# Altium PCB modulation_tx.PcbDoc
Units mil, origin at the board's own origin, x right, y up, seen from the top; angles counter-clockwise.
Board outline 1585 x 1705 mil, 2 copper layers (Top Layer, Bottom Layer); 7 components, 8 nets, 22 pads, 0 vias.
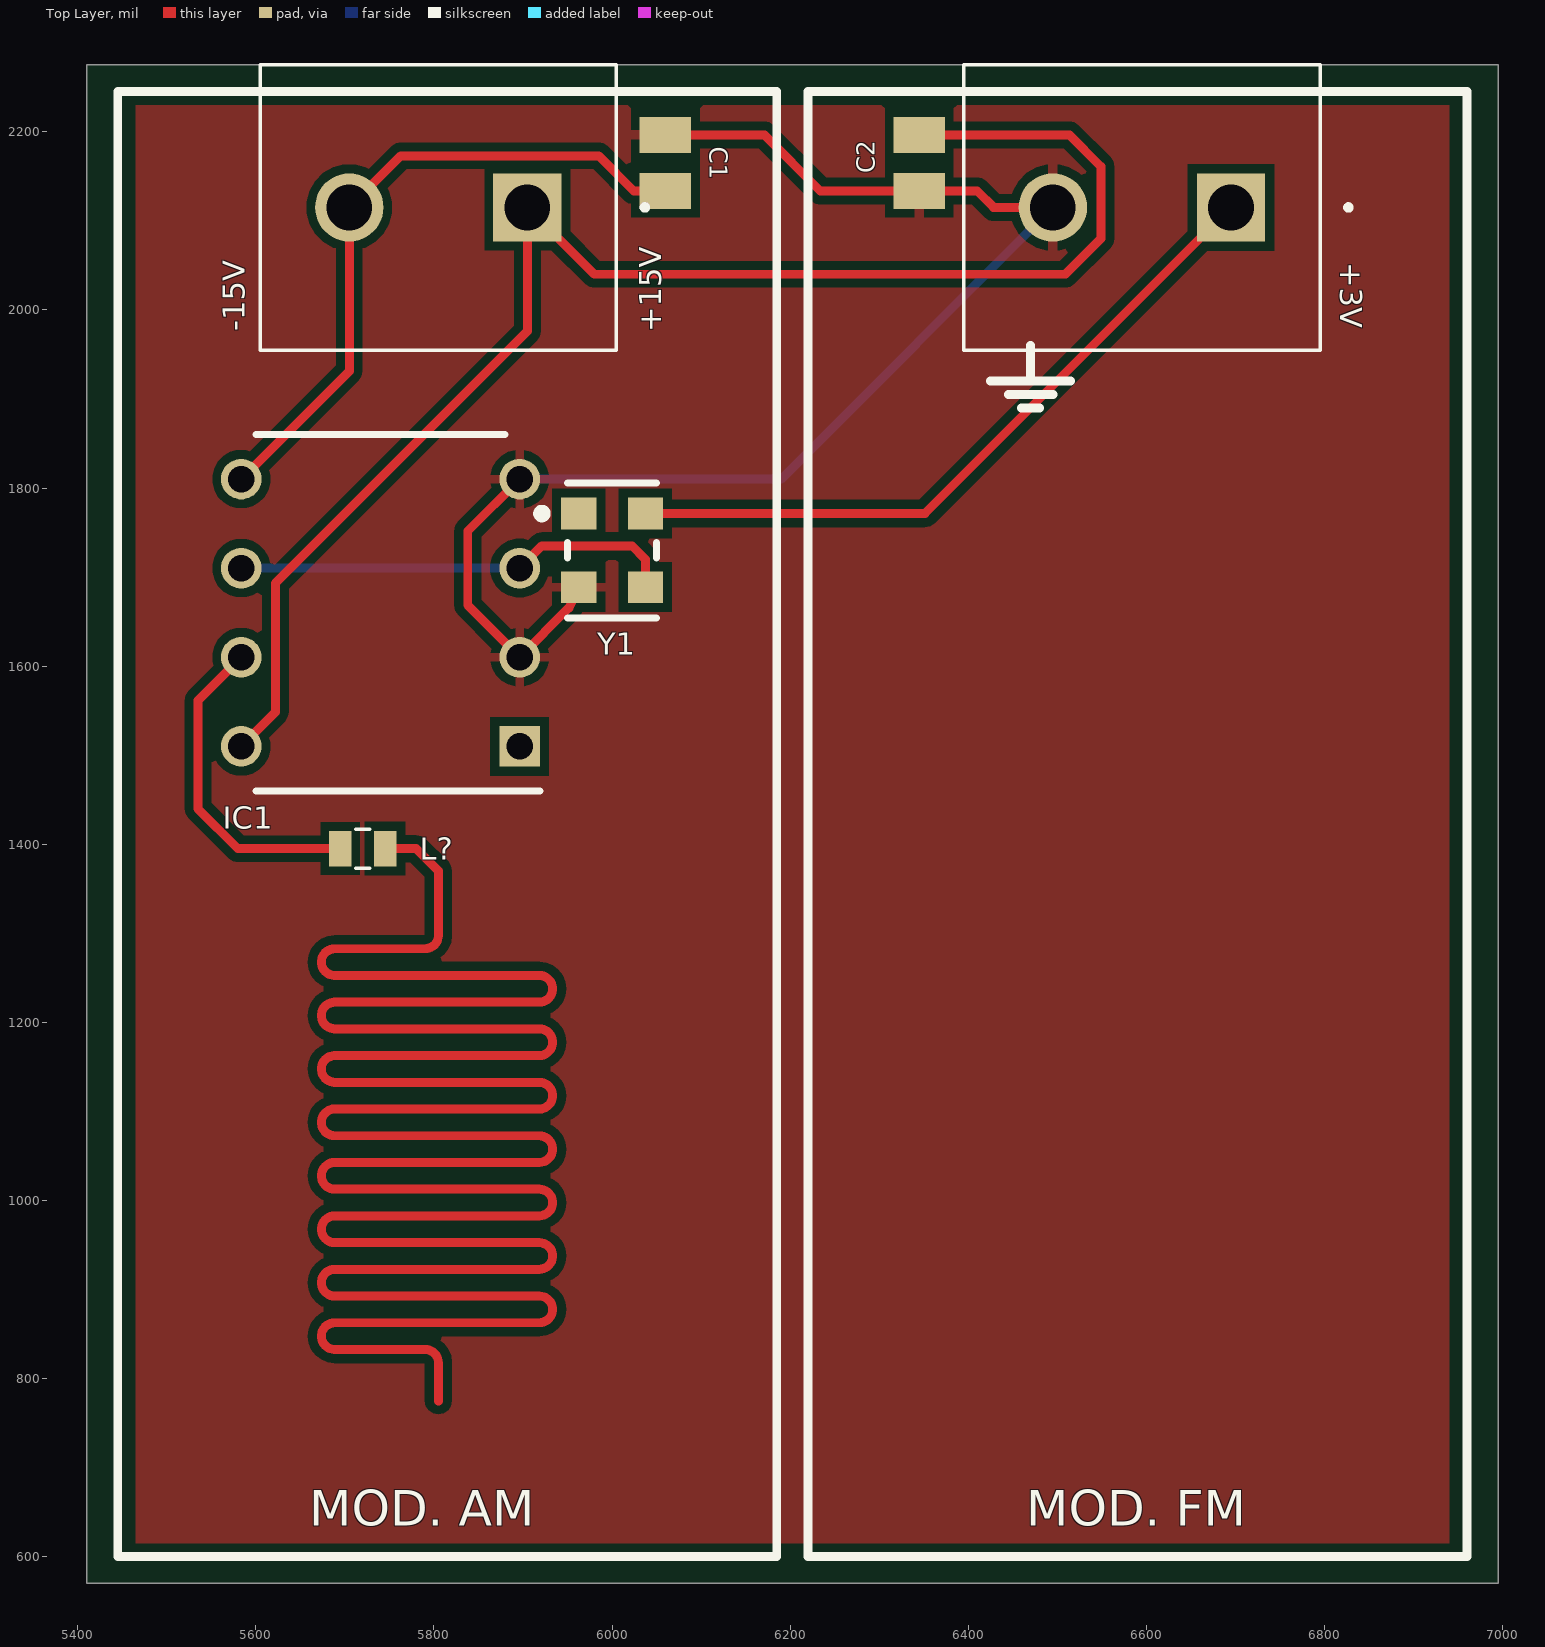
[diagram p0: Top Layer view]
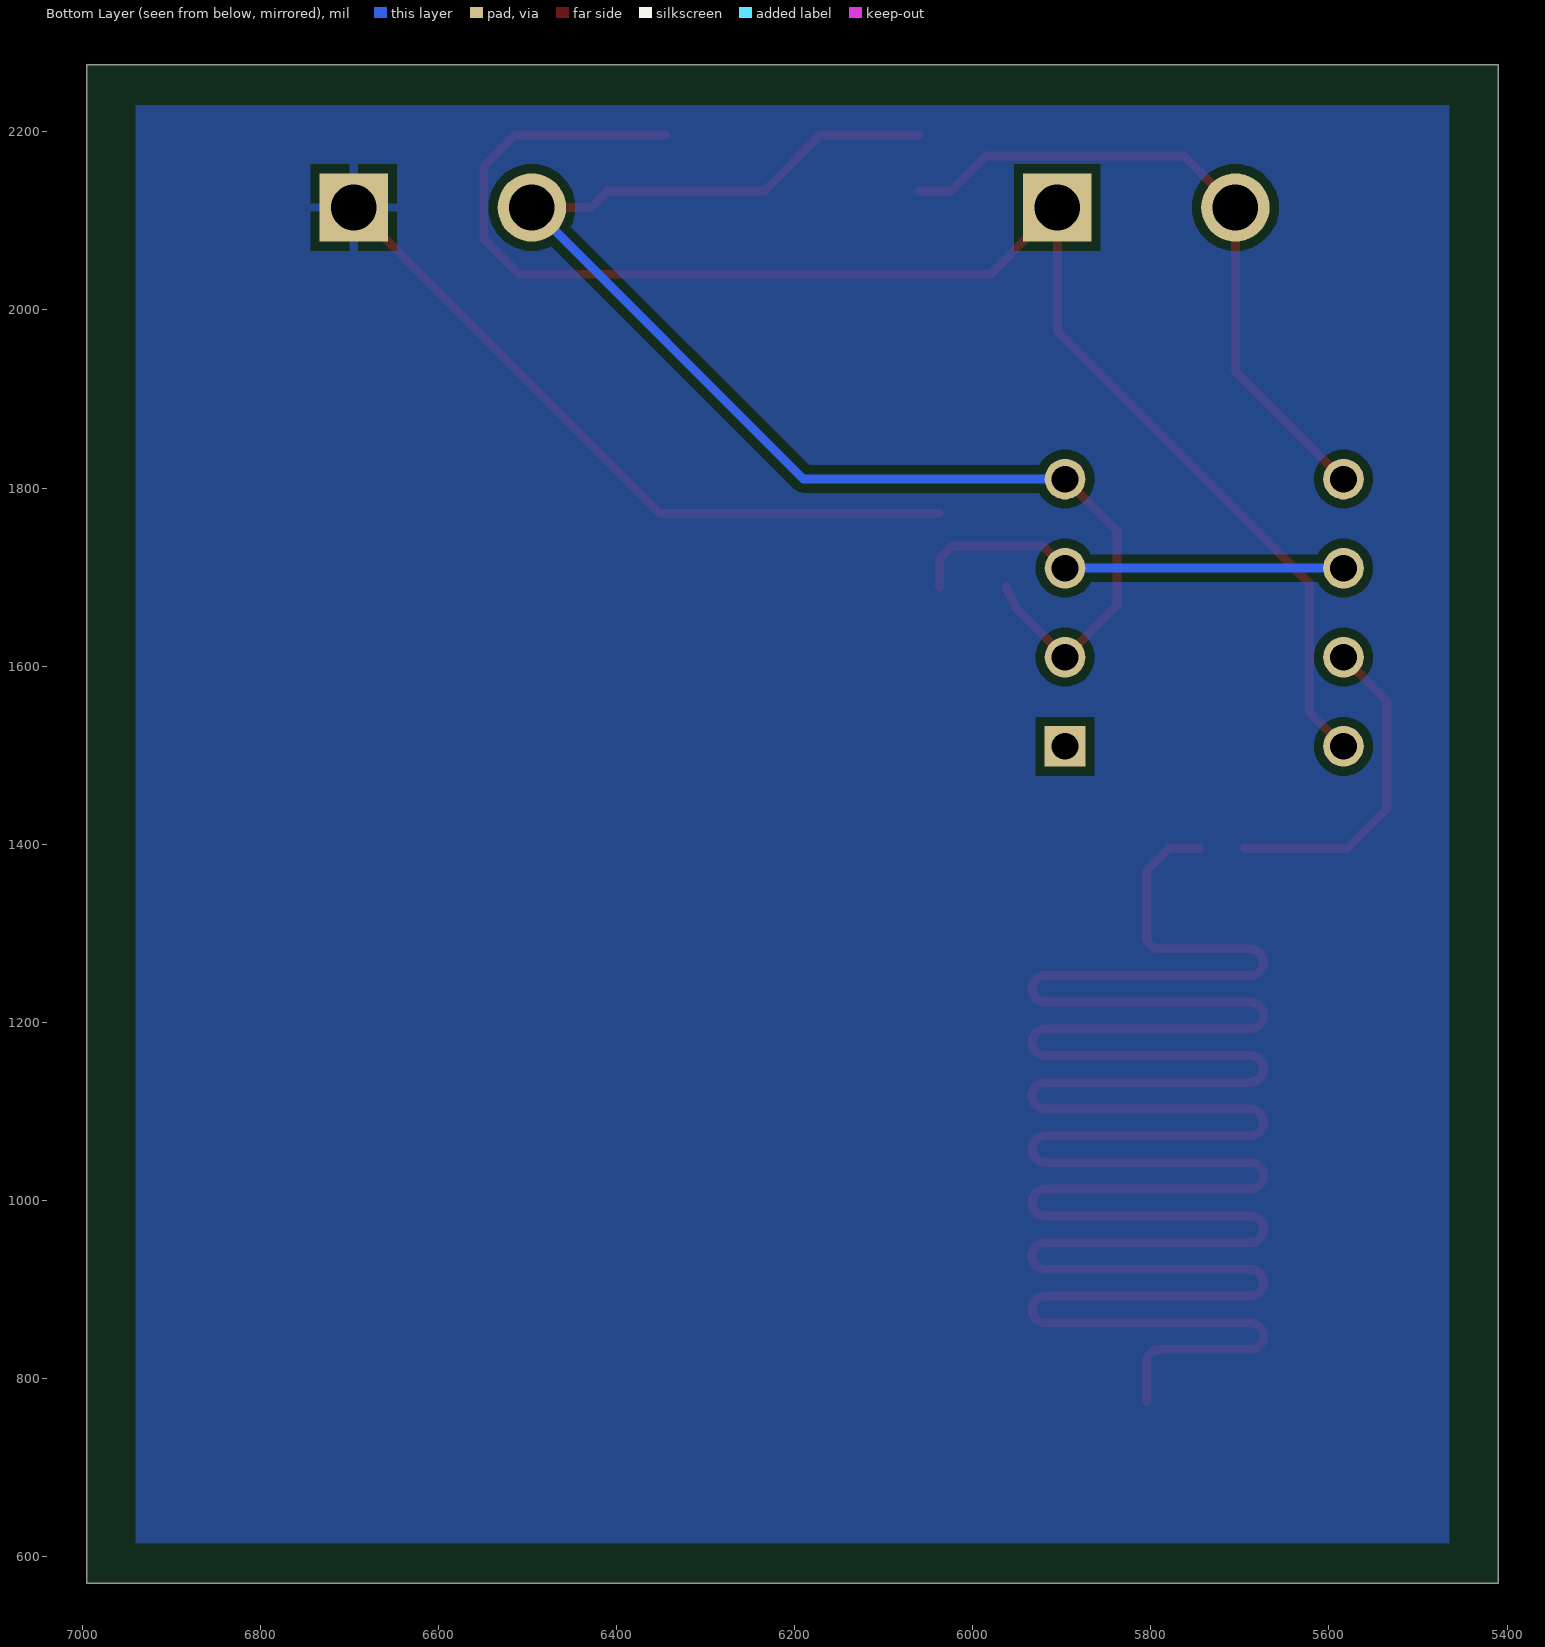
[diagram p1: Bottom Layer view, seen from below]
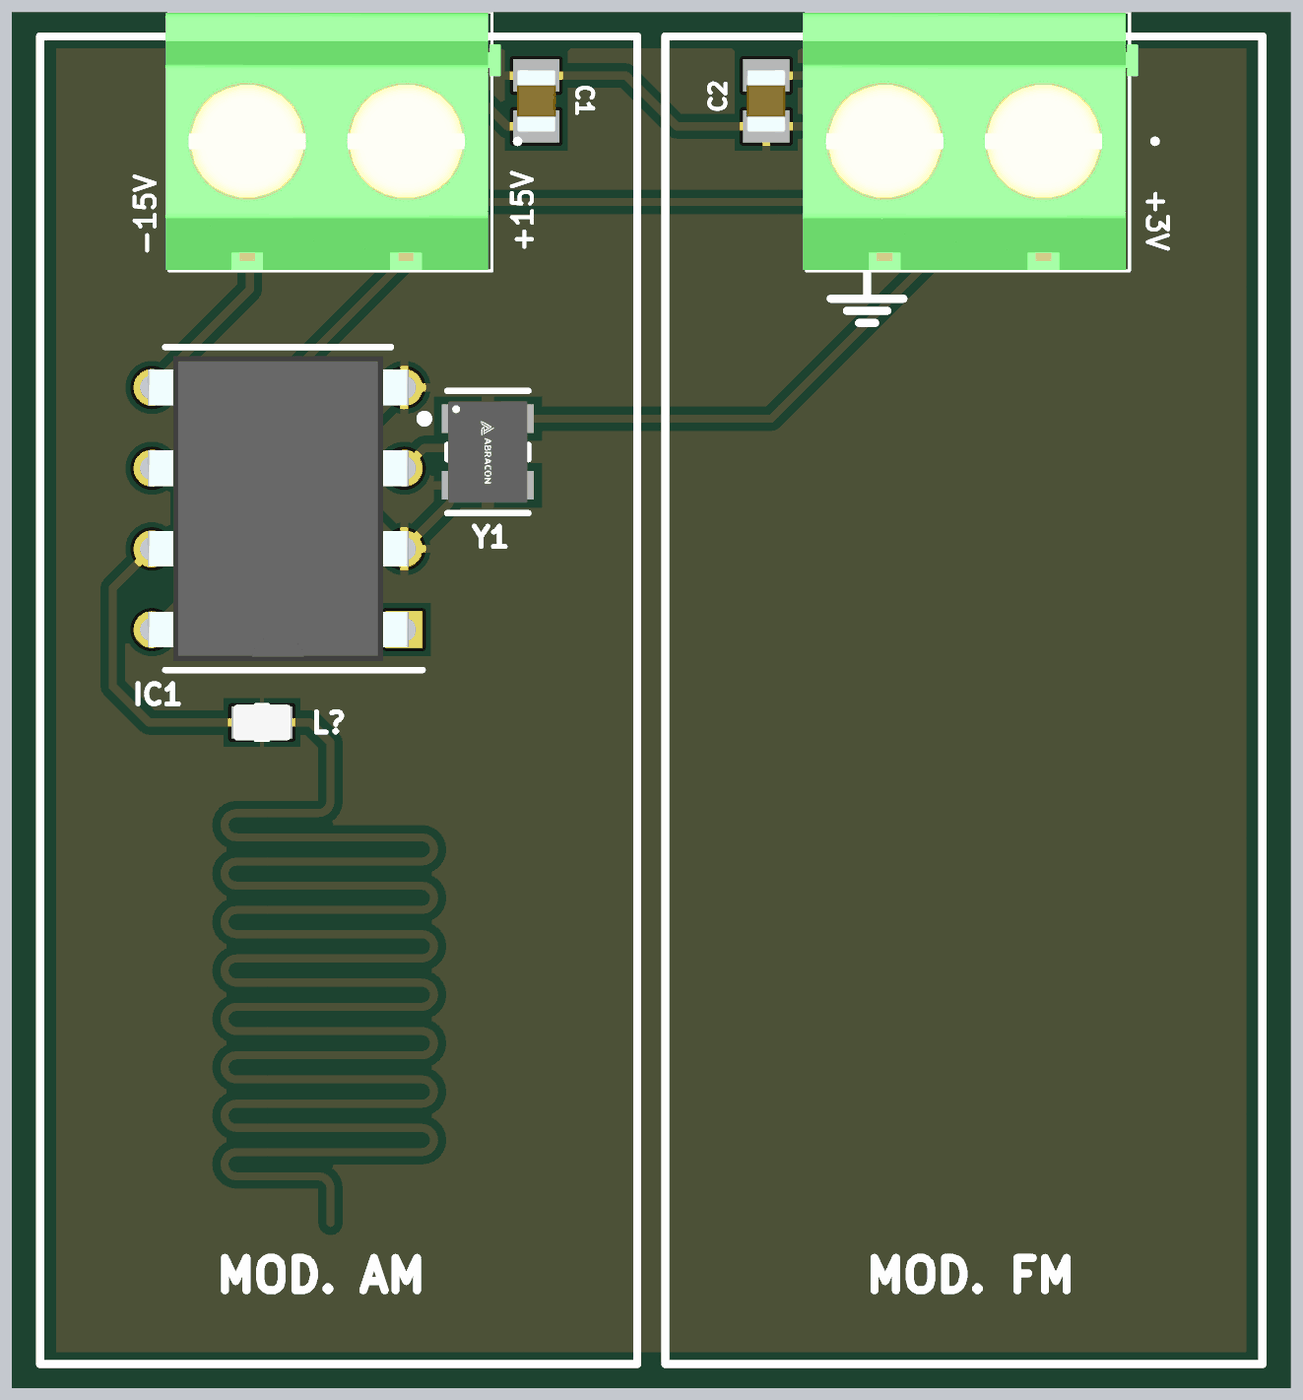
[diagram p2: 3D render of the assembled board from above, using the file's embedded part models]

## Layer stack, top to bottom
Top Solder: solder mask 0.4, Solder Resist, Dk 3.5
Top Layer: signal copper 1.4
Dielectric 1: dielectric 12.6, FR-4, Dk 4.8
Bottom Layer: signal copper 1.4
Bottom Solder: solder mask 0.4, Solder Resist, Dk 3.5

## Board outline
5410,570 5410,2275 6995,2275 6995,570

## Design rules (kind name [scope] priority, off if disabled: settings)
Clearance [All] p1: gap=10 ignorepadtopadclearanceinfootprint=FALSE
PolygonConnect [All] p1: connectstyle=Relief reliefconductorwidth=10 reliefentries=4 polygonreliefangle="90 Angle" airgapwidth=10
RoutingVias [All] p1: holewidth=28 width=50 viastyle="Through Hole" minholewidth=28 minwidth=50 maxholewidth=28 maxwidth=50
SolderMaskExpansion [All] p1: expansion=4 istentingtop=FALSE
Width [All] p1: maxlimit=10 minlimit=10 preferedwidth=10
30 further rules are at their usual default settings.

## Components (designator, comment, footprint, x,y, rotation, side; value= is the part's Value field where it differs from the comment)
+3V "1729128" 1729128 6695,2115 r180 top (schematic designator ±1)
-15V "1729128" 1729128 5905,2115 r180 top (schematic designator ±15V)
C1 "CC0805KRX7R7BB104" CAPC2012X95N 6060,2165 r270 top
C2 "CC0805KRX7R7BB104" CAPC2012X95N 6345,2165 r90 top
IC1 "AD633JNZ" DIP794W56P254L959H533Q8N 5740,1660 r180 top
L? "0603CS-R25XGLU" 0603CS82NXGLW 5720,1395 r90 top
Y1 "ASEM1-100.000MHZ-LC-T" FP-ASEM-MFG 6000,1730 r270 top

## Footprints (in the part's own frame and the unit in brackets; to place one, negate y for a bottom-side part, rotate by r counter-clockwise, add the part's x,y. Pads: shape width x height; smd on the part's side, far side on the other; paste and mask are expansions set on the pad)
0603CS82NXGLW [mm]
  rect 1.02x0.64 smd: 1(0,0.64) 2(0,-0.64)
  silkscreen extent -0.56,-0.2 0.56,0.2, body extent -0.56,-0.9 0.56,0.9, height 1.02
1729128 [mm]
  rect 1.95x1.95 hole 1.3: 1(0,0)
  round 1.95 hole 1.3: 2(5.08,0)
  silkscreen extent -3.4,-4.08 7.62,4.08, body extent -2.82,-4.05 7.74,4.05, height 10.32
CAPC2012X95N [mm]
  rect 1.02x1.47 smd: 1(-0.8,0) 2(0.8,0)
  body extent -1,-0.63 1,0.63, height 0.95
DIP794W56P254L959H533Q8N [mm]
  rect 1.16x1.16 hole 0.76: 1(-3.97,3.81)
  round 1.16 hole 0.76: 2(-3.97,1.27) 3(-3.97,-1.27) 4(-3.97,-3.81) 5(3.97,-3.81) 6(3.97,-1.27) 7(3.97,1.27) 8(3.97,3.81)
  silkscreen extent -4.55,-5.08 3.55,5.08, body extent -4.11,-4.79 4.11,4.79, height 5.33
FP-ASEM-MFG [mm]
  rect 0.9x1 smd paste+0 mask+0: 1(-1.05,-0.95) 2(1.05,-0.95) 3(1.05,0.95) 4(-1.05,0.95)
  silkscreen extent -1.93,-2.12 1.93,1.27, body extent -1.73,-1.55 1.73,1.55, height 0.25

## Part data
+3V -15V: "Connector", Manufacturer_Name="Phoenix Contact", Mouser Part Number=651-1729128, Arrow Part Number=1729128, Arrow Price/Stock=https://www.arrow.com/en/products/1729128/phoenix-contact?region=nac, Datasheet Link=http://www.phoenixcontact.net/product/1729128, Height=10.15mm, Manufacturer_Part_Number=1729128, Mouser Price/Stock=https://www.mouser.co.uk/ProductDetail/Phoenix-Contact/1729128?qs=GFUSqQMLmmnCBVBY3dts9w%3D%3D
C1 C2: "Capacitor", Manufacturer_Name=YAGEO, Mouser Part Number=603-CC805KRX7R7BB104, Arrow Part Number=CC0805KRX7R7BB104, Arrow Price/Stock=https://www.arrow.com/en/products/cc0805krx7r7bb104/yageo?region=nac, Datasheet Link=https://www.yageo.com/en/Chart/Download/pdf/CC0805KRX7R7BB104, Height=0.95mm, Manufacturer_Part_Number=CC0805KRX7R7BB104, Mouser Price/Stock=https://www.mouser.co.uk/ProductDetail/YAGEO/CC0805KRX7R7BB104?qs=AgBp2OyFlx9i%252BgKMLa7NIA%3D%3D
IC1: "Integrated Circuit", Manufacturer_Name="Analog Devices", Mouser Part Number=584-AD633JNZ, Arrow Part Number=AD633JNZ, Arrow Price/Stock=https://www.arrow.com/en/products/ad633jnz/analog-devices?region=europe, Datasheet Link=http://www.analog.com/media/en/technical-documentation/data-sheets/AD633.pdf, Height=5.33mm, Manufacturer_Part_Number=AD633JNZ, Mouser Price/Stock=https://www.mouser.co.uk/ProductDetail/Analog-Devices/AD633JNZ?qs=NmRFExCfTkGoBbkS43oI5A%3D%3D
L?: "Inductor", Manufacturer_Name=COILCRAFT, Datasheet Link=https://www.coilcraft.com/pdfs/0603cs.pdf, Height=1mm, Manufacturer_Part_Number=0603CS-R25XGLU
Y1: library part CMP-27762-005945-1, "MEMS OSC XO 100.0000MHZ CMOS SMD", Case/Package=SMD/SMT, Frequency=100MHz, Frequency Stability=50ppm, Load Capacitance=15pF, Max Operating Temperature=85°C, Max Supply Current=10mA, Max Supply Voltage=3.6V, Min Operating Temperature=-40°C, Min Supply Voltage=3V, Operating Supply Voltage=3.3V, Height=0.035inch, Lead Free="Lead Free", Length=0.126inch, Mount="Surface Mount", Number of Pins=4, Packaging="Tape and Reel", Radiation Hardening=No, Series="Pure Silicon™ ASEM", Width=0.098inch

## Nets (pads, with @x,y where several pads share a name; then routed paths per layer and width w, separated by ;. In a path a pad name is that pad's centre, name@x,y a point inside that pad or via, vN(x,y) a via of type N, cw(c..) or ccw(c..) an arc to the next point about the centre after c; other vN are vias at no path point)
3.3V: +3V.1 Y1.4 | length 799.9
  Top Layer w10: Y1.4 6351.34,1771.34 +3V.1
+15V: -15V.1 C2.2 IC1.8 | length 1729.4
  Top Layer w10: IC1.8 5622,1548.3 5622,1693 5905,1976 -15V.1 5980,2040 6509,2040 6549,2080 6549,2161 6513.5,2196.5 C2.2
-15V: -15V.2 C1.2 IC1.5 | length 750.6
  Top Layer w10: IC1.5 5705,1931.3 -15V.2 5763,2173 5985.1,2173 6024.6,2133.5 C1.2
Carrier: IC1.3 IC1.6 Y1.3 | length 501.6
  Top Layer w10: IC1.3 5921.3,1735 6022.4,1735 6037.4,1720 Y1.3
  Bottom Layer w10: IC1.6 IC1.3
GND: +3V.2 C1.1 C2.1 IC1.2 IC1.4 Y1.2 | length 1546.1
  Top Layer w10: IC1.4 5838,1751.7 5838,1668.3 IC1.2 5951.6,1665.3 Y1.2 ; C1.1 6171,2196.5 6233.99,2133.5 C2.1 6410,2133.5 6428.5,2115 +3V.2
  Bottom Layer w10: IC1.4 6190,1810 +3V.2
"MOD. AM": L?.2 | length 4358.3
  Top Layer w10: L?.2 5780,1395 5805,1370 5805,1335.2 5805,1327.72 5805,1323.04 5805,1297.68 cw(c5790,1297.68) 5790,1282.68 5688.56,1282.68 ccw(c5688.56,1267.68) 5688.56,1252.68 5918.29,1252.68 cw(c5918.29,1237.68) 5918.29,1222.68 5688.56,1222.68 ccw(c5688.56,1207.68) 5688.56,1192.68 5918.29,1192.68 cw(c5918.29,1177.68) 5918.29,1162.68 5688.56,1162.68 ccw(c5688.56,1147.68) 5688.56,1132.68 5918.29,1132.68 cw(c5918.29,1117.68) 5918.29,1102.68 5688.56,1102.68 ccw(c5688.56,1087.68) 5688.56,1072.68 5918.29,1072.68 cw(c5918.29,1057.68) 5918.29,1042.68 5688.56,1042.68 ccw(c5688.56,1027.68) 5688.56,1012.68 5918.29,1012.68 cw(c5918.29,997.68) 5918.29,982.68 5688.56,982.68 ccw(c5688.56,967.68) 5688.56,952.68 5918.29,952.68 cw(c5918.29,937.68) 5918.29,922.68 5688.56,922.68 ccw(c5688.56,907.68) 5688.56,892.68 5918.29,892.68 cw(c5918.29,877.68) 5918.29,862.68 5688.56,862.68 ccw(c5688.56,847.68) 5688.56,832.68 5790,832.68 cw(c5790,817.68) 5805,817.68 5805,812.68 5805,775
NetIC1_7: IC1.7 L?.1 | length 368.6
  Top Layer w10: IC1.7 5535,1561.3 5535,1440 5580,1395 L?.1
Signal: IC1.1
pads on no net: Y1.1

## Polygon pours and split planes (outlines as drawn)
GND on Top Layer "GND_L01_P000" (solid, pour order 0): 5465,2230 6940,2230 6940,615 5465,615
3.3V on Bottom Layer "3.3V_L02_P002" (solid, pour order 2): 5465,2230 6940,2230 6940,615 5465,615

## Silkscreen, mask and mechanical layers (free items; w line width, h text height)
Top Overlay:
  lines w10: 6425,1920 6470,1920 ; 6445,1905 6495,1905 ; 6460,1890 6480,1890 ; 6470,1960 6470,1920 ; 6515,1920 6470,1920 ; 5445,600 6185,600 6185,2245 5445,2245 5445,600 ; 6220,600 6960,600 6960,2245 6220,2245 6220,600
  text "+15V" at 6055,1975 h25 r90
  text "MOD. AM" at 5660,635 h40
  text "MOD. FM" at 6465,635 h40